# Altium PCB PCB_UCT-PCB-EEE3088F_2025-04-25.pcbdoc
Units mil, origin at the board's own origin, x right, y up, seen from the top; angles counter-clockwise.
Board outline 6270 x 3520 mil, 2 copper layers (Top Layer, Bottom Layer); 176 components, 136 nets, 463 pads, 158 vias.
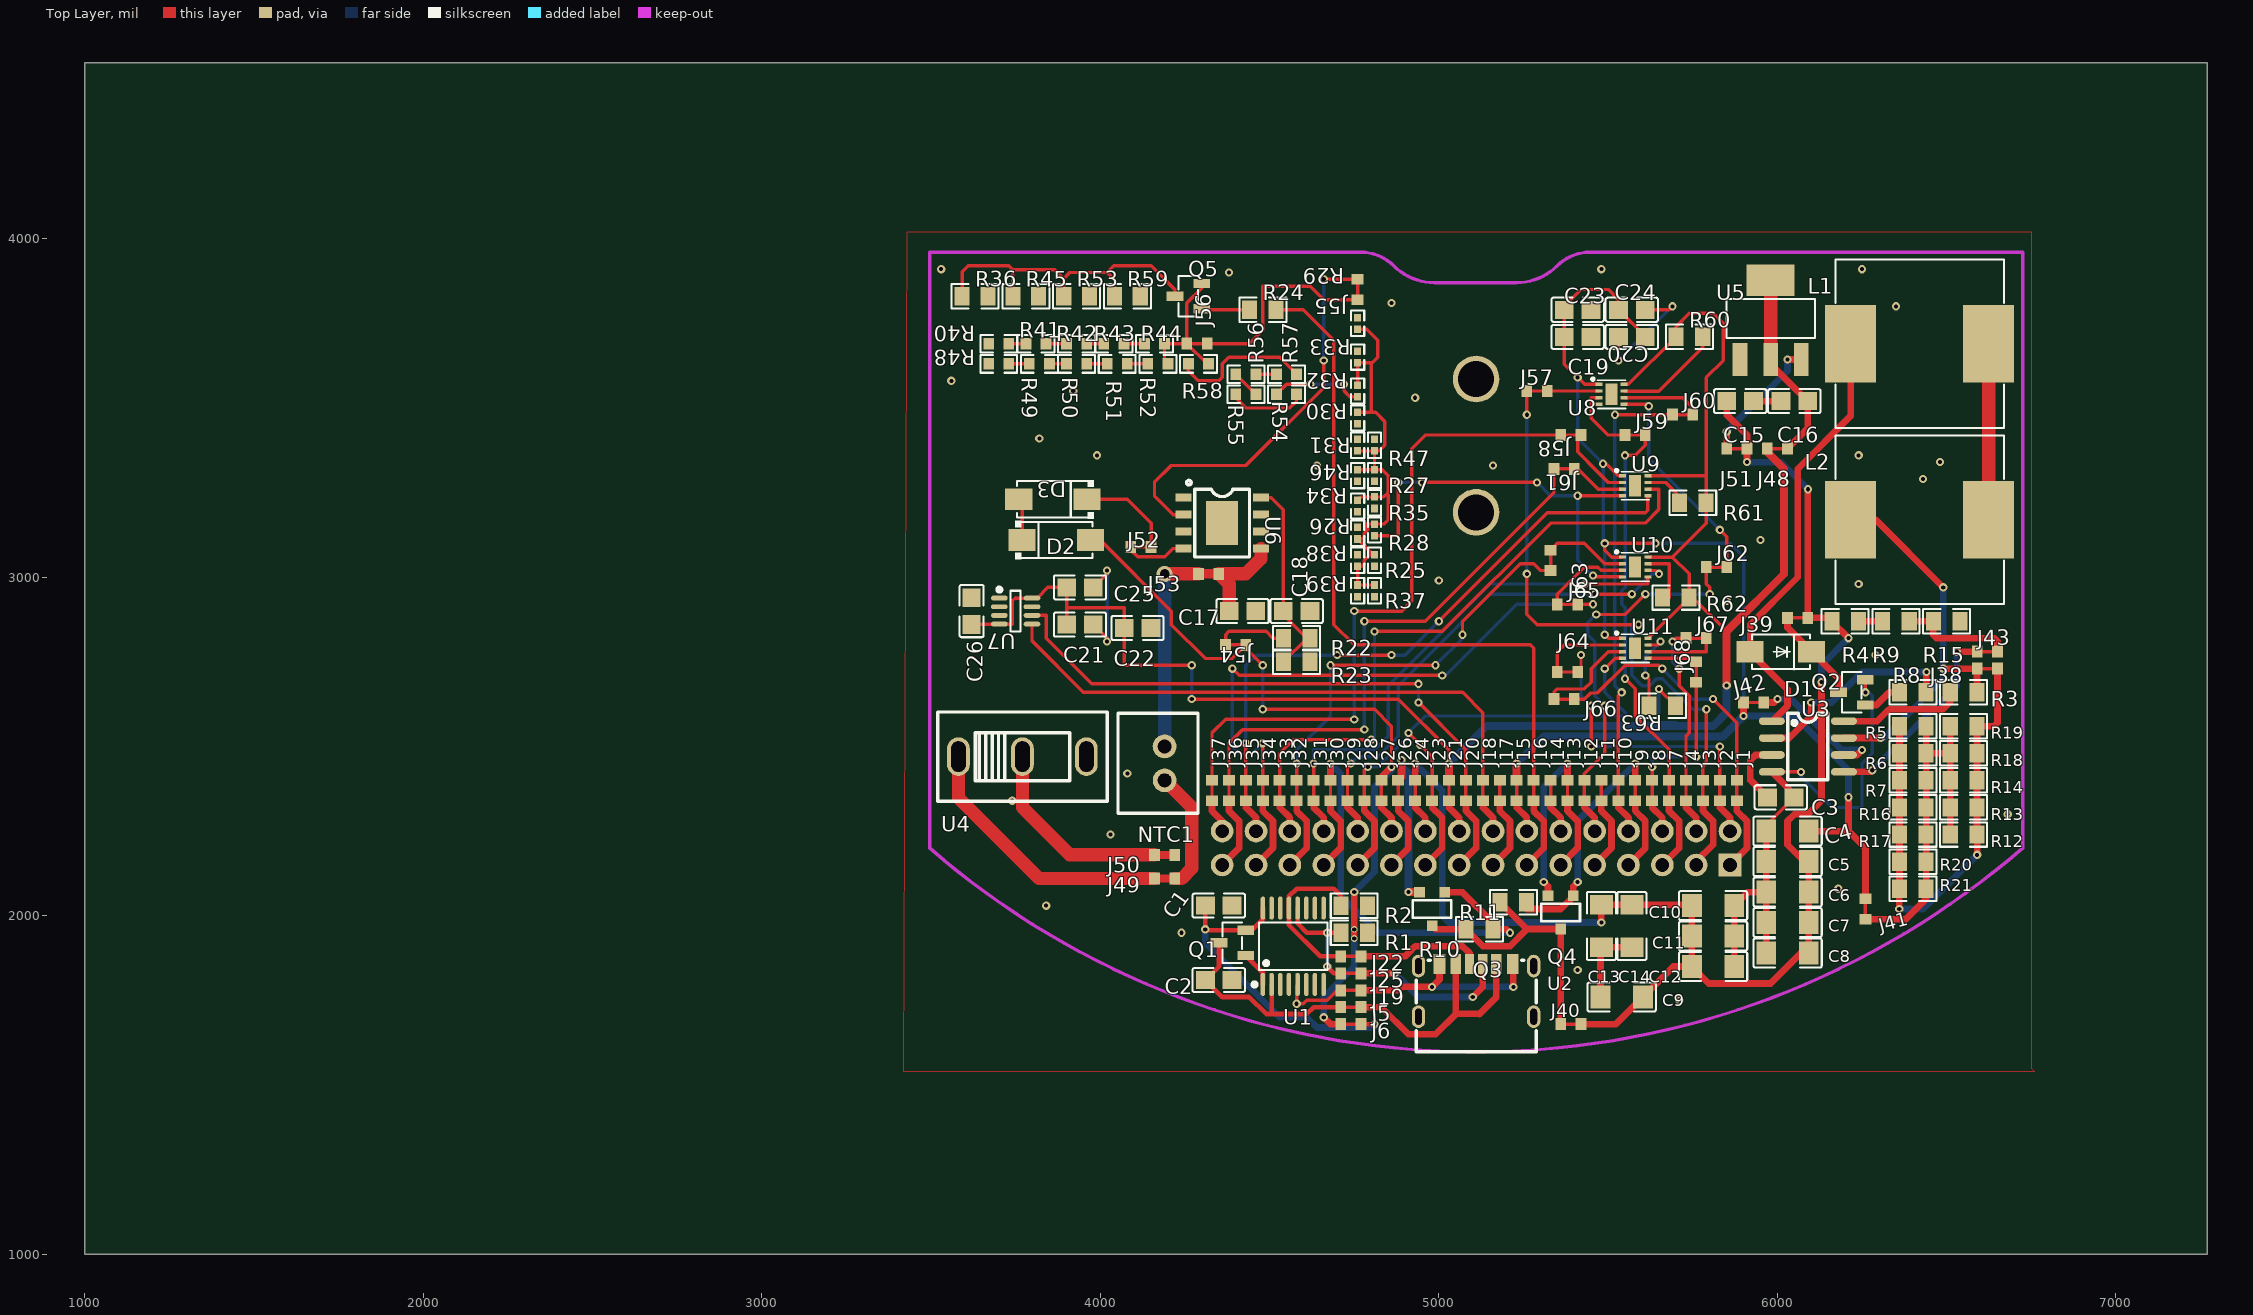
[diagram p0: Top Layer view]
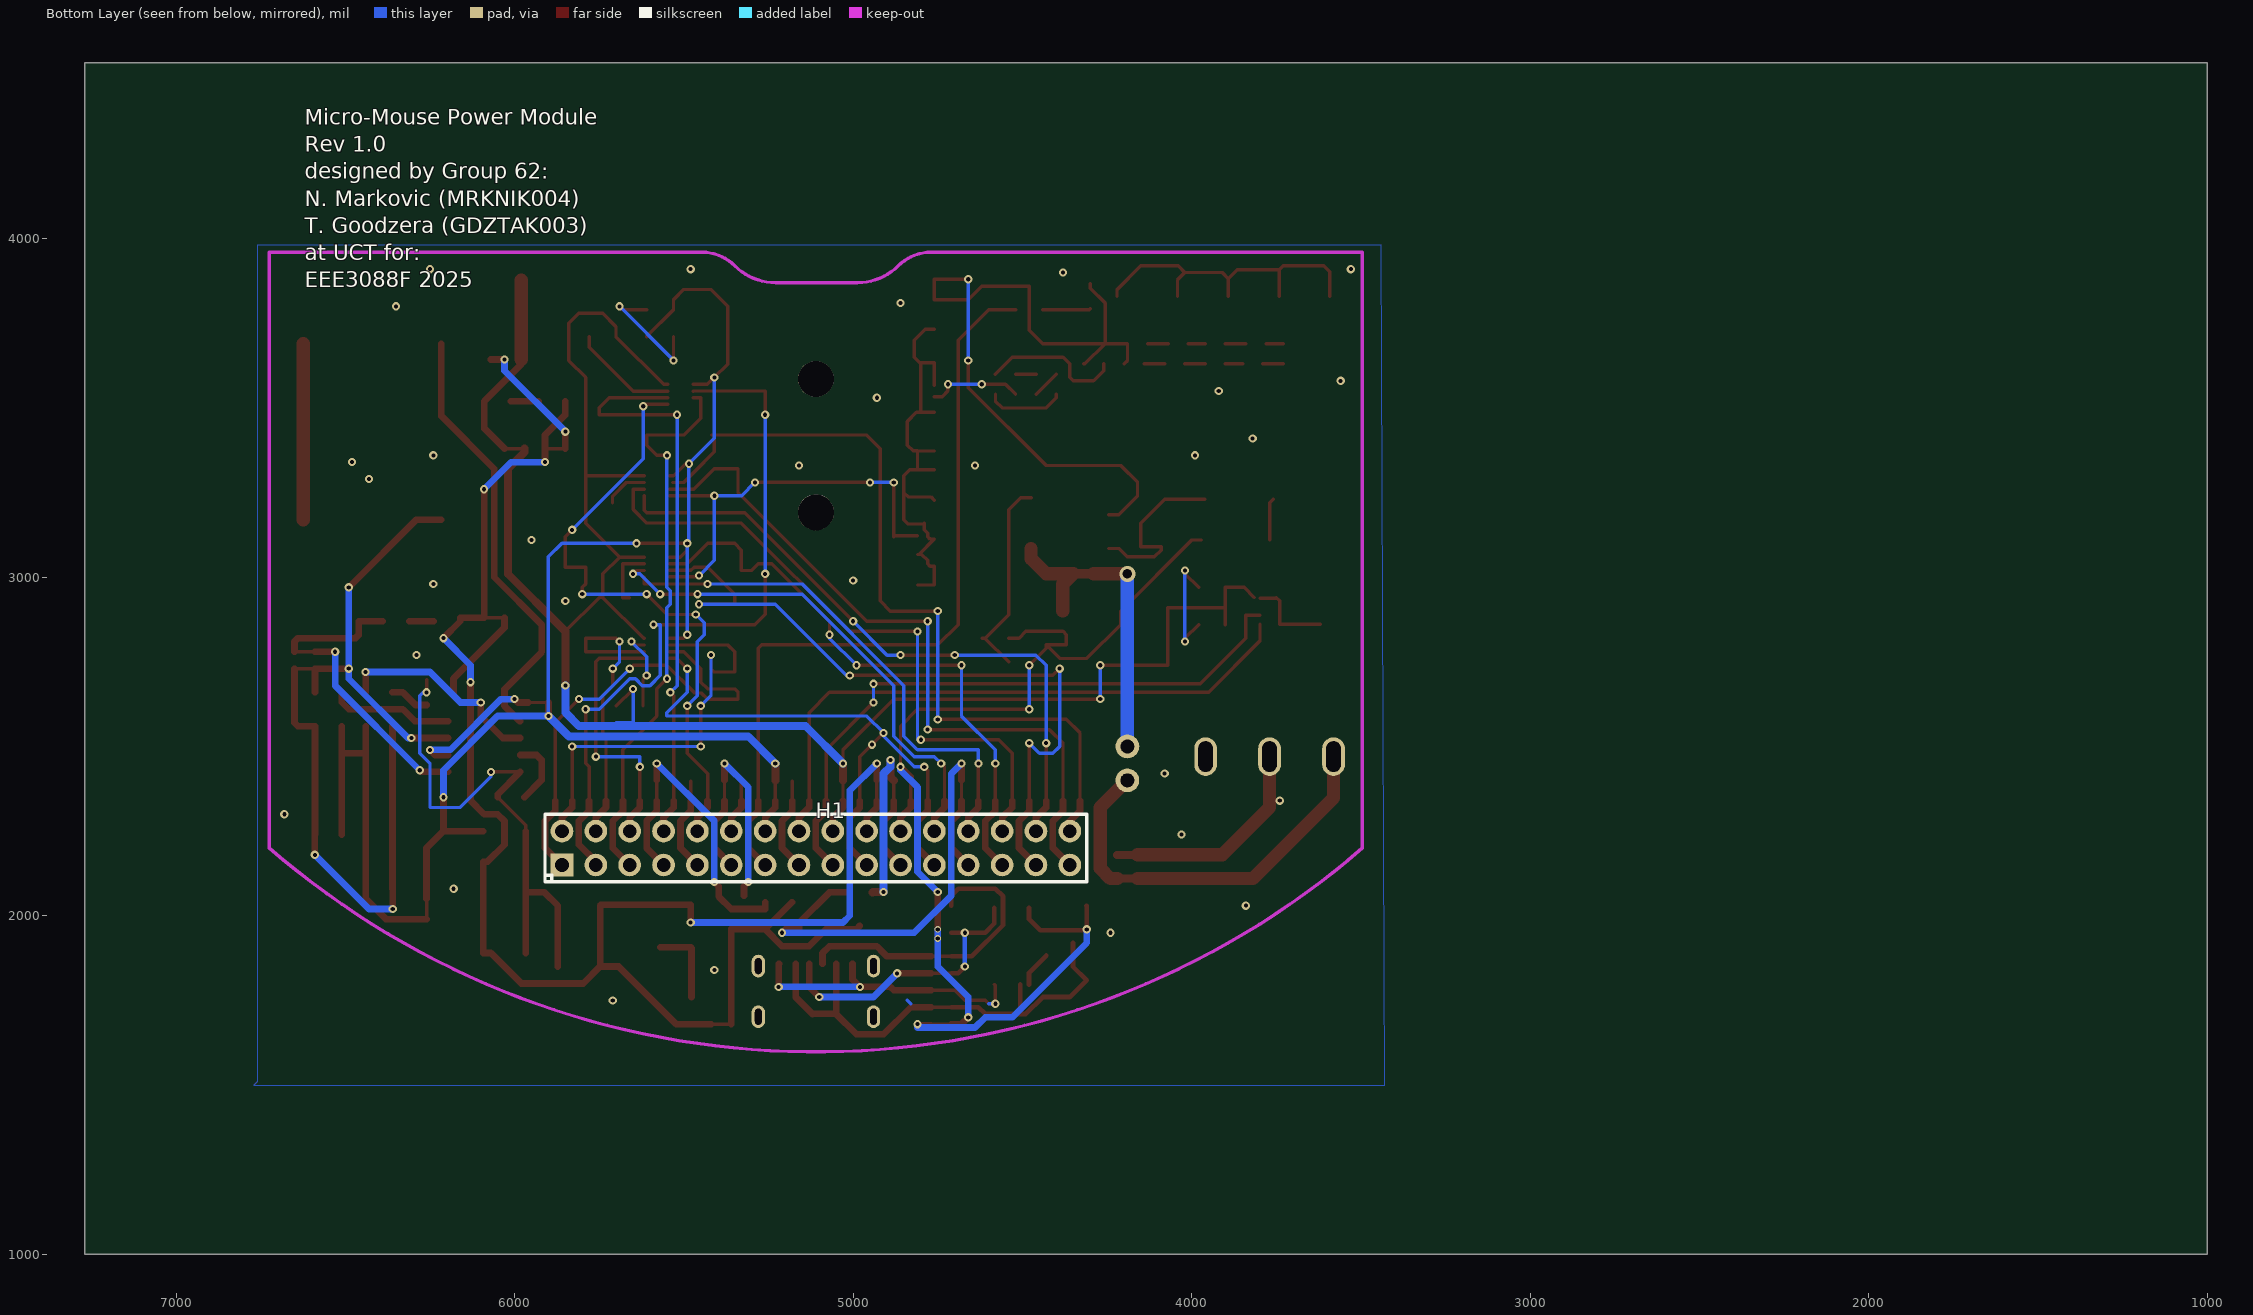
[diagram p1: Bottom Layer view, seen from below]

## Layer stack, top to bottom
Top Layer: signal copper (thickness not stored)
Dielectric: dielectric 12.6, FR-4, Dk 4.8
Bottom Layer: signal copper (thickness not stored)

## Board outline
7270,1000 1000,1000 1000,4520 7270,4520

## Components (designator, comment, footprint, x,y, rotation, side; value= is the part's Value field where it differs from the comment)
C1 "10uF" C0805 4350,2030 r0 top
C2 "1uF" C0805 4350,1810 r0 top
C3 "1nF" C0805 6010,2350 r180 top
C4 "100uF" C1206 6030,2250 r0 top
C5 "100uF" C1206 6030,2160 r0 top
C6 "100uF" C1206 6030,2070 r0 top
C7 "100uF" C1206 6030,1980 r0 top
C8 "100uF" C1206 6030,1890 r0 top
C9 "100uF" C1206 5540,1760 r0 top
C10 "100uF" C1206 5810,2030 r180 top
C11 "100uF" C1206 5810,1940 r180 top
C12 "100uF" C1206 5810,1850 r180 top
C13 "100uF" C1206 5480,1970 r90 top
C14 "100uF" C1206 5570,1970 r90 top
C15 "10uF" C0805 5890,3520 r0 top
C16 "10uF" C0805 6050,3520 r180 top
C17 "10uF" C0805 4420,2900 r0 top
C18 "10uF" C0805 4580,2900 r0 top
C19 "100nF" C0805 5410,3710 r0 top
C20 "100nF" C0805 5570,3710 r180 top
C21 "100nF" C0805 3940,2860 r0 top
C22 "100nF" C0805 4110,2850 r0 top
C23 "100nF" C0805 5410,3790 r0 top
C24 "100nF" C0805 5570,3790 r0 top
C25 "100nF" C0805 3940,2970 r0 top
C26 "100nF" C0805 3620,2900 r90 top
D1 "SS24" SMA_L4.3-W2.6-LS5.0-FD 6010,2780 r0 top
D2 "US1MG_C412437" SMA_L4.4-W2.8-LS5.4-RD 3870,3110 r0 top
D3 "US1MG_C412437" SMA_L4.4-W2.8-LS5.4-RD 3860,3230 r180 top
H1 "2X16 2.54MM" DIP-2X16P-2.54MM 4910,2200 r0 bottom
J1 "0603" JMP-0603-CUTTABLE 5880,2370 r90 top
J2 "0603" JMP-0603-CUTTABLE 5830,2370 r270 top
J3 "0603" JMP-0603-CUTTABLE 5780,2370 r90 top
J4 "0603" JMP-0603-CUTTABLE 5730,2370 r270 top
J5 "0603" JMP-0603-CUTTABLE 4740,1730 r0 top
J6 "0603" JMP-0603-CUTTABLE 4740,1680 r0 top
J7 "0603" JMP-0603-CUTTABLE 5680,2370 r90 top
J8 "0603" JMP-0603-CUTTABLE 5630,2370 r270 top
J9 "0603" JMP-0603-CUTTABLE 5580,2370 r90 top
J10 "0603" JMP-0603-CUTTABLE 5530,2370 r270 top
J11 "0603" JMP-0603-CUTTABLE 5480,2370 r90 top
J12 "0603" JMP-0603-CUTTABLE 5430,2370 r270 top
J13 "0603" JMP-0603-CUTTABLE 5380,2370 r90 top
J14 "0603" JMP-0603-CUTTABLE 5330,2370 r270 top
J15 "0603" JMP-0603-CUTTABLE 5280,2370 r90 top
J16 "0603" JMP-0603-CUTTABLE 5230,2370 r270 top
J17 "0603" JMP-0603-CUTTABLE 5180,2370 r90 top
J18 "0603" JMP-0603-CUTTABLE 5130,2370 r270 top
J19 "0603" JMP-0603-CUTTABLE 4740,1780 r0 top
J20 "0603" JMP-0603-CUTTABLE 5080,2370 r90 top
J21 "0603" JMP-0603-CUTTABLE 5030,2370 r270 top
J22 "0603" JMP-0603-CUTTABLE 4740,1880 r180 top
J23 "0603" JMP-0603-CUTTABLE 4980,2370 r90 top
J24 "0603" JMP-0603-CUTTABLE 4930,2370 r270 top
J25 "0603" JMP-0603-CUTTABLE 4740,1830 r180 top
J26 "0603" JMP-0603-CUTTABLE 4880,2370 r90 top
J27 "0603" JMP-0603-CUTTABLE 4830,2370 r270 top
J28 "0603" JMP-0603-CUTTABLE 4780,2370 r90 top
J29 "0603" JMP-0603-CUTTABLE 4730,2370 r270 top
J30 "0603" JMP-0603-CUTTABLE 4680,2370 r90 top
J31 "0603" JMP-0603-CUTTABLE 4630,2370 r270 top
J32 "0603" JMP-0603-CUTTABLE 4580,2370 r90 top
J33 "0603" JMP-0603-CUTTABLE 4530,2370 r270 top
J34 "0603" JMP-0603-CUTTABLE 4480,2370 r90 top
J35 "0603" JMP-0603-CUTTABLE 4430,2370 r270 top
J36 "0603" JMP-0603-CUTTABLE 4380,2370 r90 top
J37 "0603" JMP-0603-CUTTABLE 4330,2370 r270 top
J38 "0603" JMP-0603-CUTTABLE 6620,2730 r180 top
J39 "0603" JMP-0603-CUTTABLE 6060,2880 r0 top
J40 "0603" JMP-0603-CUTTABLE 5390,1680 r0 top
J41 "0603" JMP-0603-CUTTABLE 6260,2020 r270 top
J42 "0603" JMP-0603-CUTTABLE 5930,2630 r0 top
J43 "0603" JMP-0603-CUTTABLE 6620,2780 r180 top
J48 "0603" JMP-0603-CUTTABLE 6000,3380 r0 top
J49 "0603" JMP-0603-CUTTABLE 4190,2110 r180 top
J50 "0603" JMP-0603-CUTTABLE 4190,2180 r180 top
J51 "0603" JMP-0603-CUTTABLE 5880,3380 r0 top
J52 "0603" JMP-0603-CUTTABLE 4120,3090 r0 top
J53 "0603" JMP-0603-CUTTABLE 4320,3010 r0 top
J54 "0603" JMP-0603-CUTTABLE 4400,2800 r0 top
J55 "0603" JMP-0603-CUTTABLE 4760,3850 r90 top
J56 "0603" JMP-0603-CUTTABLE 4285.75,3690 r0 top
J57 "0603" JMP-0603-CUTTABLE 5290,3550 r180 top
J58 "0603" JMP-0603-CUTTABLE 5390,3420 r180 top
J59 "0603" JMP-0603-CUTTABLE 5580,3420 r0 top
J60 "0603" JMP-0603-CUTTABLE 5720,3480 r0 top
J61 "0603" JMP-0603-CUTTABLE 5370,3320 r180 top
J62 "0603" JMP-0603-CUTTABLE 5820,3030 r0 top
J63 "0603" JMP-0603-CUTTABLE 5330,3050 r270 top
J64 "0603" JMP-0603-CUTTABLE 5380,2720 r0 top
J65 "0603" JMP-0603-CUTTABLE 5380,2920 r0 top
J66 "0603" JMP-0603-CUTTABLE 5370,2640 r0 top
J67 "0603" JMP-0603-CUTTABLE 5760,2820 r0 top
J68 "0603" JMP-0603-CUTTABLE 5760,2720 r90 top
L1 "22uH" IND-SMD_L12.5-W12.5 6420,3690 r180 top
L2 "22uH" IND-SMD_L12.5-W12.5 6420,3170 r0 top
NTC1 "NTC/10k" "2PIN_2.54_MM_JST_XHP_JST_CONNECTOR 1" 4190,2400 r180 top
Q1 "SI2302" SOT-23-3_L2.9-W1.3-P1.90-LS2.4-BR 4390,1920 r0 top
Q2 "SI2302" SOT-23-3_L2.9-W1.3-P1.90-LS2.4-BR 6220,2660 r0 top
Q3 "SI2301_C427391" SOT-23-3_L2.9-W1.5-P1.90-LS2.6-BL 4980,2020 r180 top
Q4 "SI2301_C427391" SOT-23-3_L2.9-W1.5-P1.90-LS2.6-BL 5360,2010 r180 top
Q5 "SI2302" SOT-23-3_L2.9-W1.3-P1.90-LS2.4-BR 4260,3830 r0 top
R1 "5.1kΩ" R0805 4750,1950 r0 top
R2 "5.1kΩ" R0805 4750,2030 r0 top
R3 "180Ω" R0805 6550,2660 r180 top
R4 "3.6kΩ" R0805 6200,2870 r0 top
R5 "1Ω" R0805 6400,2560 r0 top
R6 "1Ω" R0805 6400,2480 r0 top
R7 "1Ω" R0805 6400,2400 r0 top
R8 "180Ω" R0805 6400,2660 r0 top
R9 "180Ω" R0805 6350,2870 r0 top
R10 "5.1kΩ" R0805 5120,1960 r0 top
R11 "5.1kΩ" R0805 5220,2040 r0 top
R12 "1Ω" R0805 6550,2240 r180 top
R13 "1Ω" R0805 6550,2320 r180 top
R14 "1Ω" R0805 6550,2400 r180 top
R15 "1.2kΩ" R0805 6500,2870 r0 top
R16 "1Ω" R0805 6400,2320 r0 top
R17 "1Ω" R0805 6400,2240 r0 top
R18 "1Ω" R0805 6550,2480 r180 top
R19 "1Ω" R0805 6550,2560 r180 top
R20 "1Ω" R0805 6400,2160 r0 top
R21 "1Ω" R0805 6400,2080 r0 top
R22 "5.1kΩ" R0805 4580,2820 r0 top
R23 "5.1kΩ" R0805 4580,2750 r0 top
R24 "180Ω" R0805 4480,3790 r0 top
R25 "1Ω" R0402 4810,3140 r90 top
R26 "1Ω" R0402 4760,3130 r90 top
R27 "1Ω" R0402 4810,3300 r90 top
R28 "1Ω" R0402 4810,3050 r270 top
R29 "1Ω" R0402 4760,3750 r90 top
R30 "1Ω" R0402 4760,3470 r90 top
R31 "1Ω" R0402 4760,3390 r90 top
R32 "1Ω" R0402 4760,3550 r90 top
R33 "1Ω" R0402 4760,3650 r90 top
R34 "1Ω" R0402 4760,3210 r90 top
R35 "1Ω" R0402 4810,3220 r270 top
R36 "10Ω" R0805_NEW 3630,3830 r0 top
R37 "1Ω" R0402 4810,2960 r90 top
R38 "1Ω" R0402 4760,3050 r90 top
R39 "1Ω" R0402 4760,2960 r90 top
R40 "3.3Ω" R0603 3700,3690 r0 top
R41 "3.3Ω" R0603 3810,3690 r0 top
R42 "3.3Ω" R0603 3930,3690 r0 top
R43 "3.3Ω" R0603 4040,3690 r0 top
R44 "3.3Ω" R0603 4160,3690 r0 top
R45 "10Ω" R0805_NEW 3780,3830 r0 top
R46 "1Ω" R0402 4760,3300 r90 top
R47 "1Ω" R0402 4810,3390 r90 top
R48 "3.3Ω" R0603 3700,3630 r0 top
R49 "3.3Ω" R0603 3820,3630 r0 top
R50 "3.3Ω" R0603 3930,3630 r0 top
R51 "3.3Ω" R0603 4050,3630 r0 top
R52 "3.3Ω" R0603 4170,3630 r0 top
R53 "10Ω" R0805_NEW 3930,3830 r0 top
R54 "3.3Ω" R0603 4550,3540 r0 top
R55 "3.3Ω" R0603 4430,3540 r0 top
R56 "3.3Ω" R0603 4430,3600 r0 top
R57 "3.3Ω" R0603 4550,3600 r0 top
R58 "3.3Ω" R0603 4290,3630 r0 top
R59 "10Ω" R0805_NEW 4080,3830 r0 top
R60 "5.1kΩ" R0805 5740,3710 r0 top
R61 "5.1kΩ" R0805 5750,3220 r180 top
R62 "5.1kΩ" R0805 5700,2940 r180 top
R63 "5.1kΩ" R0805 5660,2620 r180 top
U1 "IP2721" TSSOP-16_L5.0-W4.4-P0.65-LS6.4-BL 4570,1910 r0 top
U2 "TYPE-C" USB-C-SMD_HC-TYPE-C-6P-010B 5110,1780 r0 top
U3 "MC34063ADR2G" SOIC-8_L5.0-W4.0-P1.27-LS6.0-BL 6090,2500 r270 top
U4 "HX" SW-TH_3P-P4.80-HX-SS12D10G4 3770,2470 r0 top
U5 "AMS1117-3.3" SOT-223-3_L6.5-W3.4-P2.30-LS7.0-BR 5980,3760 r270 top
U6 "TP4056" ESOP-8_L4.9-W3.9-P1.27-LS6.0-BL-EP 4360,3160 r270 top
U7 "INA219AIDCNR" SOT-23-8_L3.0-W1.7-P0.65-LS2.8-BR 3750,2900 r180 top
U8 "DRV8837CDSGR" WSON-8_L2.0-W2.0-P0.50-TL-EP 5510,3540 r0 top
U9 "DRV8837CDSGR" WSON-8_L2.0-W2.0-P0.50-TL-EP 5580,3270 r0 top
U10 "DRV8837CDSGR" WSON-8_L2.0-W2.0-P0.50-TL-EP 5580,3030 r0 top
U11 "DRV8837CDSGR" WSON-8_L2.0-W2.0-P0.50-TL-EP 5580,2790 r0 top

## Footprints (in the part's own frame and the unit in brackets; to place one, negate y for a bottom-side part, rotate by r counter-clockwise, add the part's x,y. Pads: shape width x height; smd on the part's side, far side on the other; paste and mask are expansions set on the pad)
"2PIN_2.54_MM_JST_XHP_JST_CONNECTOR 1" [mil]
  round 70 hole 40 slot 40.2 at 0 deg paste+0 mask+2: 1(0,0) 2(0.08,-100.06)
  silkscreen extent -98,-198 138,97
C0805 [mm]
  rect 1.41x1.35 smd paste-100 mask+0.051: 1(-1,0) 2(1,0)
  silkscreen extent -1.96,-0.9 1.96,0.9
C1206 [mm]
  rect 1.485x1.728 smd paste-100 mask+0.051: 1(-1.593,0) 2(1.593,0)
  silkscreen extent -2.56,-1.09 2.56,1.09
DIP-2X16P-2.54MM [mm]
  rect 1.7x1.7 hole 1.02 paste+0 mask+0.051: 1(24.13,1.27)
  round 1.7 hole 1.02 paste+0 mask+0.051: 2(24.13,-1.27) 3(21.59,1.27) 4(21.59,-1.27) 5(19.05,1.27) 6(19.05,-1.27) 7(16.51,1.27) 8(16.51,-1.27) 9(13.97,1.27) 10(13.97,-1.27) 11(11.43,1.27) 12(11.43,-1.27) 13(8.89,1.27) 14(8.89,-1.27) 15(6.35,1.27) 16(6.35,-1.27) 17(3.81,1.27) 18(3.81,-1.27) 19(1.27,1.27) 20(1.27,-1.27) 21(-1.27,1.27) 22(-1.27,-1.27) 23(-3.81,1.27) 24(-3.81,-1.27) 25(-6.35,1.27) 26(-6.35,-1.27) 27(-8.89,1.27) 28(-8.89,-1.27) 29(-11.43,1.27) 30(-11.43,-1.27) 31(-13.97,1.27) 32(-13.97,-1.27)
  silkscreen extent -15.24,-2.54 25.4,2.54
ESOP-8_L4.9-W3.9-P1.27-LS6.0-BL-EP [mm]
  rect 0.6x1.2 smd paste+0 mask+0.051: 1(-1.905,-2.908) 2(-0.635,-2.908) 3(0.635,-2.908) 4(1.905,-2.908) 5(1.905,2.908) 6(0.635,2.908) 7(-0.635,2.908) 8(-1.905,2.908)
  rect 3.3x2.4 smd paste+0 mask+0.051: 9(0,0)
  silkscreen extent -3.2,-2.67 2.55,2.05
IND-SMD_L12.5-W12.5 [mm]
  rect 3.824x5.82 smd paste+0 mask+0.051: 1(5.178,0) 2(-5.178,0)
  silkscreen extent -6.33,-6.33 6.33,6.33
JMP-0603-CUTTABLE [mm]
  rect 0.8x0.9 smd paste+0 mask+0.102: 1(-0.762,0) 2(0.762,0)
  Top Layer lines w0.254: -0.7,0 0.7,0
R0402 [mm]
  rect 0.566x0.54 smd paste-100 mask+0.051: 1(-0.433,0) 2(0.433,0)
  silkscreen extent -0.94,-0.5 0.94,0.5
R0603 [mil]
  rect 31.75x34.02 smd paste-3937.01 mask+2: 1(-29.66,0) 2(29.65,0)
  silkscreen extent -55,-26 55,26
R0805 [mil]
  rect 44.59x54.21 smd paste-3937.01 mask+2: 1(-39.37,0) 2(39.37,0)
  silkscreen extent -69,-36 69,36
R0805_NEW [mil]
  rect 44.59x54.21 smd paste-3937.01 mask+2: 1(-38.04,0) 2(38.04,0)
  silkscreen extent -69,-36 69,36
SMA_L4.3-W2.6-LS5.0-FD [mm]
  rect 2.046x1.62 smd paste+0 mask+0.051: 1(-2.304,-0.009) 2(2.304,0.009)
  silkscreen extent -2.17,-1.32 2.19,1.29
SMA_L4.4-W2.8-LS5.4-RD [mm]
  rect 2.046x1.62 smd paste+0 mask+0.051: 1(-2.566,0) 2(2.565,0)
  silkscreen extent -3.08,-1.44 2.7,1.44
SOIC-8_L5.0-W4.0-P1.27-LS6.0-BL [mil]
  oval 22.38x76.78 smd paste+0 mask+2: 1(-75,-106.5) 2(-25,-106.5) 3(25,-106.5) 4(75,-106.5) 5(75,106.5) 6(25,106.5) 7(-25,106.5) 8(-75,106.5)
  silkscreen extent -98,-59 98,59
SOT-23-3_L2.9-W1.3-P1.90-LS2.4-BR [mm]
  rect 1.25x0.7 smd paste+0 mask+0.051: 1(1,-0.95) 2(1,0.95) 3(-1,0)
  silkscreen extent -0.73,-1.53 0.73,1.53
SOT-23-3_L2.9-W1.5-P1.90-LS2.6-BL [mm]
  rect 0.8x0.8 smd paste+0 mask+0.05: 1(-0.95,-1.25) 2(0.95,-1.25) 3(0,1.25)
  silkscreen extent -1.44,-0.66 1.46,0.66
SOT-23-8_L3.0-W1.7-P0.65-LS2.8-BR [mil]
  oval 49.29x14.33 smd paste+0 mask+2: 1(48.27,-38.39) 2(48.28,-12.8) 3(48.28,12.79) 4(48.27,38.39) 5(-48.27,38.39) 6(-48.26,12.79) 7(-48.26,-12.8) 8(-48.27,-38.39)
  silkscreen extent -15,-69 54,60
SOT-223-3_L6.5-W3.4-P2.30-LS7.0-BR [mm]
  rect 2.5x1.1 smd paste+0 mask+0.051: 1(2.97,-2.3) 2(2.97,0) 3(2.97,2.3)
  rect 2.34x3.6 smd paste+0 mask+0.051: 4(-2.97,0)
  silkscreen extent -1.57,-3.33 1.37,3.33
SW-TH_3P-P4.80-HX-SS12D10G4 [mm]
  oval 1.7x2.9 hole 1.1 slot 2.3 at 90 deg paste+0 mask+0.05: 1(-4.8,0) 2(0,0) 3(4.8,0)
  silkscreen extent -6.35,-3.35 6.35,3.35
TSSOP-16_L5.0-W4.4-P0.65-LS6.4-BL [mm]
  oval 0.343x1.731 smd paste+0 mask+0.051: 1(-2.275,-2.866) 2(-1.625,-2.866) 3(-0.975,-2.866) 4(-0.325,-2.866) 5(0.325,-2.866) 6(0.975,-2.866) 7(1.625,-2.866) 8(2.275,-2.866) 9(2.275,2.866) 10(1.625,2.866) 11(0.975,2.866) 12(0.325,2.866) 13(-0.325,2.866) 14(-0.975,2.866) 15(-1.625,2.866) 16(-2.275,2.866)
  silkscreen extent -3.05,-3.02 2.58,1.77
USB-C-SMD_HC-TYPE-C-6P-010B [mm]
  oval 1x1.7 hole 0.5 slot 1.2 at 90 deg paste+0 mask+0.051: 1(-4.32,1.815) 2(4.32,1.815) 3(-4.32,-1.985) 4(4.32,-1.985)
  rect 0.7x1.5 smd paste-100 mask+0.051: A5(-0.5,1.985) B5(0.5,1.985)
  rect 0.8x1.5 smd paste-100 mask+0.051: A9(1.52,1.985) B9(-1.52,1.985)
  rect 0.9x1.5 smd paste-100 mask+0.051: A12(2.75,1.985) B12(-2.75,1.985)
  silkscreen extent -4.5,-4.6 4.5,2.25
WSON-8_L2.0-W2.0-P0.50-TL-EP [mm]
  rect 0.521x0.25 smd paste+0 mask+0.05: 1(-0.95,0.75) 2(-0.95,0.25) 3(-0.95,-0.25) 4(-0.95,-0.75) 5(0.95,-0.75) 6(0.95,-0.25) 7(0.95,0.25) 8(0.95,0.75)
  rect 0.9x1.6 smd paste+0 mask+0.05: 9(0,0)
  silkscreen extent -1.47,-1.06 1.06,1.22

## Free pads (board coordinates)
  round 137.79 smd paste-3937.01 mask+2: 1(5110,3191.73) 1(5110,3585.43)
  round 106.3 hole 106.3 unplated paste+0: ""(5110,3191.73) ""(5110,3585.43)

## Via types
v1: diameter 24.41, hole 12.2, Top Layer to Bottom Layer, tented both sides, 155 vias
v2: diameter 19.69, hole 12.2, Top Layer to Bottom Layer, tented both sides, 2 vias
v3: diameter 47.24, hole 27.56, Top Layer to Bottom Layer, tented both sides, 1 vias

## Nets (pads, with @x,y where several pads share a name; then routed paths per layer and width w, separated by ;. In a path a pad name is that pad's centre, name@x,y a point inside that pad or via, vN(x,y) a via of type N, cw(c..) or ccw(c..) an arc to the next point about the centre after c; other vN are vias at no path point)
001: pad.1@5110,3191.73
002: pad.1@5110,3585.43
3V3: C21.1 C22.1 C25.1 C26.1 J21.1 J48.1 R60.1 R61.1 R62.1 R63.1 U7.4 U7.8 U8.8 U9.8 U10.8 U11.8 | length 5871.7
  Top Layer w10: C26.1 U7.4 ; U7.4 3740,2861.61 3740,2930 3750,2940 3751.61,2938.39 U7.8 ; U7.8@3814.69,2940 3844.69,2970 C25.1 C21.1 ; 3900.63,2910 4070.63,2910 C22.1 4070.63,2740 ; 4070.6,2740 v1(4270,2740) ; v1(4270,2640) 4880,2640 5030,2490 v1(5030,2450) ; U8.8 5559.5,3569.5 R60.1 5700.6,3740.6 5740,3780 5810,3780 5840,3750 5840,3640 5790,3590 5790,3283 ; U11.8 5618.9,2819.53 R62.1 ; U10.8 5689.53,3059.53 ; U9.8 5789.4,3299.5 R61.1 ; v1(5650,2670) 5650,2669.37 R63.1 ; R61.1 5789.37,3159.37 5689.53,3059.53 ; 5850,2840 5750,2940 R62.1 ; 5689.53,3059.53 5739.37,3009.69 R62.1
  Top Layer w23.62: J21.1 v1(5030,2450) ; v1(5850,2680) 5850,2840 5860,2850 6020,3010 6020,3320 5970,3369.99 J48.1
  Bottom Layer w10: v1(4270,2640) v1(4270,2740) ; v1(5650,2670) 5650,2570 5699.4,2570
  Bottom Layer w23.62: v1(5030,2450) 5140,2560 5810,2560 5850,2600 v1(5850,2680)
D1_2: D1.2 J39.1 Q2.3 | length 282.4
  Top Layer w19.68: J39.1 6030,2851.1 D1.2 6180.6,2700.4 Q2.3
D3_1: D3.1 J52.2 | length 288
  Top Layer w10: D3.1 4080,3230 4150,3160 J52.2
D3_2: D2.1 D3.2 | length 124.1
  Top Layer w10: D3.2 3769,3220 D2.1
GND: C1.2 C2.2 C3.1 C4.1 C5.1 C6.1 C7.1 C8.1 C9.1 C10.1 C11.1 C12.1 C13.1 C14.1 C15.2 C16.2 C17.2 C18.2 C19.2 C20.2 C21.2 C22.2 C23.2 C24.2 C25.2 C26.2 J19.1 J23.2 J28.2 J50.1 J50.2 Q2.2 R1.2 R2.2 R15.2 R23.2 R25.1 R26.2 R27.1 R28.2 R29.2 R30.1 R31.2 R32.1 R33.2 R34.1 R35.2 R36.2 R37.1 R38.2 R39.1 R40.1 R45.2 R46.1 R47.2 R48.1 R53.2 R54.1 R59.2 U1.5 U3.4 U4.2 U5.1 U6.1 U6.3 U6.6 U6.7 U6.9 U7.1 U7.2 U7.3 U7.7 U8.4 U9.4 U10.4 U11.4 | length 6376.1
  Top Layer w10: C21.2 4020,2819.37 v1(4020,2810) ; C25.2 4020,3010.63 v1(4020,3020) ; R54.1@4520.35,3540 4520.35,3540.35 4550,3570 v1(4620,3570) ; U1.5 4580,1794.37 v1(4580,1740) 4600,1740 4610,1750 4670,1750 J19.1@4700,1780 ; v1(4720,3570) 4720,3550 4737.04,3532.96 R32.1 ; J28.2 4780,2430 v1(4790,2440) ; R25.1 4877.04,3122.96 4880,3120 v1(4880,3280) ; v1(4910,2540) v1(4944.5,2505.5) 4980,2470 J23.2 ; v1(4950,3280) 5210,3280 v1(5290,3280) ; v1(5410,3240.47) U9.4 ; v1(5455,3005) 5459,3001 U10.4@5543,3001 ; v1(5490,2730) 5520.47,2760.47 U11.4 ; v1(5530.63,3640) C20.2 ; C24.2 5680,3790 v1(5690,3800) ; C4.1 5967.3,2267.93 C3.1 ; U3.4 v1(6070,2425) ; Q2.2 6260,2696.77 v1(6260,2660) ; J19.1@4700,1780 J19.1 ; J19.1@4700,1780 J19.1 ; J19.1@4700,1780 J19.1
  Top Layer w19.68: C9.1 5477.3,1904.6 C13.1 C14.1 ; C12.1 C10.1 5912.7,2070 C6.1 ; C15.2 C16.2 ; C8.1 C4.1 ; U3.4 6049.37,2359.13 C3.1
  Top Layer w23.62: J50.2 J50.1
  Top Layer w39.37: U4.2 3770.01,2320 3910,2180.01 J50.2
  Bottom Layer w10: v1(4020,2810) v1(4020,3020) ; v1(4580,1740) 4600,1740 ; v1(4620,3570) v1(4720,3570) ; v1(4790,2440) 4820,2440 4910,2530 v1(4910,2540) 4960,2590 5550,2590 5550,2600 5490,2660 v1(5490,2730) ; 4830,1740 4840,1750 ; v1(4880,3280) v1(4950,3280) ; v1(5290,3280) 5329.53,3240.47 v1(5410,3240.47) 5410,3050 v1(5455,3005) ; v1(5530.63,3640) 5530.63,3640.63 v1(5690,3800) ; v1(6070,2425) 6070,2410 6160,2320 6250,2320 6250,2450 6280,2480 6280,2650 6270,2660 v1(6260,2660)
  other v1: 5710,1750 5410,1840 4240,1950 3840,2030 6180,2080 4030,2240 6680,2300 3740,2340 4080,2420 6290,2770 5850,2930 6240,2980 5000,2990 5950,3110 6430,3290 4640,3330 5160,3330 6480,3340 3990,3360 6240,3360 3820,3410 4930,3530 3920,3550 3560,3580 6350,3800 4860,3810 4380,3900 3530,3910 5480,3910 6250,3910
H1_1: H1.1 J1.1 | length 223.1
  Top Layer w19.68: H1.1 5910,2200 5910,2280 5880,2310 J1.1
H1_2: H1.2 J2.2 | length 102.4
  Top Layer w19.68: J2.2 5830,2320 5860,2290 H1.2
H1_3: H1.3 J3.1 | length 223.1
  Top Layer w19.68: H1.3 5760,2160 5810,2210 5810,2280 5780,2310 J3.1
H1_4: H1.4 J4.2 | length 102.4
  Top Layer w19.68: J4.2 5730,2320 5760,2290 H1.4
H1_5: H1.5 J7.1 | length 223.1
  Top Layer w19.68: H1.5 5710,2200 5710,2280 5680,2310 J7.1
H1_6: H1.6 J8.2 | length 102.4
  Top Layer w19.68: J8.2 5630,2320 5660,2290 H1.6
H1_7: H1.7 J9.1 | length 223.1
  Top Layer w19.68: H1.7 5610,2200 5610,2280 5580,2310 J9.1
H1_8: H1.8 J10.2 | length 102.4
  Top Layer w19.68: J10.2 5530,2320 5560,2290 H1.8
H1_9: H1.9 J11.1 | length 223.1
  Top Layer w19.68: H1.9 5510,2200 5510,2280 5480,2310 J11.1
H1_10: H1.10 J12.2 | length 102.4
  Top Layer w19.68: J12.2 5430,2320 5460,2290 H1.10
H1_11: H1.11 J13.1 | length 223.1
  Top Layer w19.68: H1.11 5410,2200 5410,2280 5380,2310 J13.1
H1_12: H1.12 J14.2 | length 102.4
  Top Layer w19.68: J14.2 5330,2320 5360,2290 H1.12
H1_13: H1.13 J15.1 | length 223.1
  Top Layer w19.68: H1.13 5310,2200 5310,2280 5280,2310 J15.1
H1_14: H1.14 J16.2 | length 102.4
  Top Layer w19.68: J16.2 5230,2320 5260,2290 H1.14
H1_15: H1.15 J17.1 | length 223.1
  Top Layer w19.68: H1.15 5210,2200 5210,2280 5180,2310 J17.1
H1_16: H1.16 J18.2 | length 102.4
  Top Layer w19.68: J18.2 5129.99,2320.01 5160,2290 H1.16
H1_17: H1.17 J20.1 | length 223.1
  Top Layer w19.68: H1.17 5110,2200 5110,2280 5080,2310 J20.1
H1_18: H1.18 J21.2 | length 102.4
  Top Layer w19.68: J21.2 5030,2320 5060,2290 H1.18
H1_19: H1.19 J23.1 | length 223.1
  Top Layer w19.68: H1.19 5010,2200 5010,2290 4980,2320 J23.1
H1_20: H1.20 J24.2 | length 102.4
  Top Layer w19.68: J24.2 4930,2320 4960,2290 H1.20
H1_21: H1.21 J26.1 | length 223.1
  Top Layer w19.68: H1.21 4910,2200 4910,2280 4880,2310 J26.1
H1_22: H1.22 J27.2 | length 102.4
  Top Layer w19.68: J27.2 4830,2320 4860,2290 H1.22
H1_23: H1.23 J28.1 | length 223.1
  Top Layer w19.68: H1.23 4810,2200 4810,2280 4780.01,2310 J28.1
H1_24: H1.24 J29.2 | length 102.4
  Top Layer w19.68: J29.2 4730,2320 4760,2290 H1.24
H1_25: H1.25 J30.1 | length 223.1
  Top Layer w19.68: H1.25 4710,2200 4710,2280 4680.01,2310 J30.1
H1_26: H1.26 J31.2 | length 102.4
  Top Layer w19.68: J31.2 4630,2320 4660,2290 H1.26
H1_27: H1.27 J32.1 | length 223.1
  Top Layer w19.68: H1.27 4610,2200 4610,2280 4580.01,2310 J32.1
H1_28: H1.28 J33.2 | length 102.4
  Top Layer w19.68: J33.2 4530,2320 4560,2290 H1.28
H1_29: H1.29 J34.1 | length 223.1
  Top Layer w19.68: H1.29 4510,2200 4510,2280 4480.01,2310 J34.1
H1_30: H1.30 J35.2 | length 102.4
  Top Layer w19.68: J35.2 4430,2320 4460,2290 H1.30
H1_31: H1.31 J36.1 | length 223.1
  Top Layer w19.68: H1.31 4410,2200 4410,2280 4380.01,2310 J36.1
H1_32: H1.32 J37.2 | length 102.4
  Top Layer w19.68: J37.2 4330,2310 4360,2280 H1.32
ISET: J55.1 J56.2 | length 607.4
  Top Layer w10: J56.2 4440,3690 4480,3730 4480,3860 4620,3860 4660,3820 J55.1
L1_2: L1.2 L2.1 | length 520
  Top Layer w39.37: L2.1 L1.2
MM_5V5: C5.2 C6.2 C7.2 C8.2 C9.2 C10.2 C11.2 C12.2 C13.2 C14.2 C15.1 J24.1 J39.2 J40.2 J51.2 R4.1 | length 4323.9
  Top Layer w19.68: J24.1 v1(4930,2450) ; J40.2 5522.7,1680 C9.2 5692.7,1850 C12.2 ; v1(5480,1980) C13.2 5744.6,2032.7 C10.2 C12.2 ; C15.1 5850.6,3479.4 5910,3420 J51.2 v1(5910,3340) ; v1(6090,3260) J39.2 6160.6,2880 R4.1 6210,2820.6 v1(6210,2820) ; v1(6130,2690) 6130,2360 6130,2340 6090,2300 6050,2300 6030,2280 6030,2210 6080,2160 C5.2 C8.2 6070,1890 5980,1800 5797.3,1800 C12.2
  Bottom Layer w19.68: v1(4930,2450) 5010,2370 5010,2000 5030,1980 v1(5480,1980) ; v1(5910,3340) 6010,3340 v1(6090,3260) ; v1(6130,2690) 6130,2740 v1(6210,2820)
MM_EXT1CTRL: J30.2 Q3.1 R10.2 | length 1251.6
  Top Layer w19.68: J30.2 v1(4680,2450) ; Q3.1 5070,2069.21 5159.37,1979.84 R10.2 5200,1960 v1(5210,1950)
  Bottom Layer w19.68: v1(4680,2450) 4710,2420 4710,2060 4820,1950 v1(5210,1950)
MM_EXT1OUT: J26.2 Q3.2 | length 495.4
  Top Layer w23.62: J26.2 4890,2409.99 v1(4890,2460) ; v1(4910,2070) 4941.81,2070 Q3.2
  Bottom Layer w23.62: v1(4890,2460) 4890,2440 4910,2420 v1(4910,2070)
MM_EXT2CTRL: J9.2 Q4.1 R11.2 | length 691.8
  Top Layer w19.68: R11.2 5259.37,2020 5360,2020 5397.4,2057.4 Q4.1 5397.4,2087.4 v1(5410,2100) ; J9.2 v1(5580,2450)
  Bottom Layer w19.68: v1(5410,2100) 5410,2280 v1(5580,2450)
MM_EXT2OUT: J13.2 Q4.2 | length 475
  Top Layer w19.68: v1(5310,2100) 5322.6,2087.4 Q4.2 ; J13.2 v1(5380,2450)
  Bottom Layer w19.68: v1(5310,2100) 5310,2380 v1(5380,2450)
MM_FASTCHCTRL: J15.2 R24.2 | length 2056.9
  Top Layer w10: R24.2 4600,3790 4690,3700 4690,2860 4750,2800 5270,2800 5280,2790 J15.2
MM_I2C1SCL: J18.1 U7.5 | length 1669.3
  Top Layer w10: U7.5 3798.3,2811.7 3950,2660 5070,2660 5130,2600 J18.1
MM_I2C1SDA: J20.2 U7.6 | length 1607.8
  Top Layer w10: U7.6 3840,2887.21 3840,2820 3975,2685 v1(4940,2685) ; v1(4940,2630) 5080,2490 J20.2
  Bottom Layer w10: v1(4940,2630) v1(4940,2685)
MM_M1AOUT: J37.1 J58.2 | length 1985.6
  Top Layer w10: J37.1 4330,2540 4370,2580 v1(4750,2580) ; v1(4750,2900) 4890,2900 4920,2930 4920,3380 4960,3420 4980,3420 J58.2
  Bottom Layer w10: v1(4750,2580) 4750,2590 v1(4750,2900)
MM_M1BOUT: J36.2 J61.2 | length 1634
  Top Layer w10: J36.2 4380,2510 4420,2550 v1(4780,2550) ; v1(4780,2870) 4960,2870 5020,2930 5340,3250 J61.2
  Bottom Layer w10: v1(4780,2550) v1(4780,2870)
MM_M1CTRL1: J33.1 U9.6 | length 1778.4
  Top Layer w10: J33.1 4530,2480 4570,2520 v1(4800,2520) ; v1(4810,2840) 5010,2840 5330,3160 5610,3160 5650,3200 5650,3260.1 U9.6@5617.4,3260.1
  Bottom Layer w10: v1(4800,2520) 4810,2520 v1(4810,2840)
MM_M1CTRL2: J35.1 U9.5 | length 1759.9
  Top Layer w10: J35.1 v1(4430,2510) ; v1(4700,2770) 4820,2770 v1(4860,2770) ; v1(5000,2870) 5320,3190 5610,3190 5617.4,3197.4 U9.5
  Bottom Layer w10: v1(4430,2510) 4430,2740 4460,2770 v1(4700,2770) ; v1(4860,2770) 4900,2770 v1(5000,2870)
MM_M2AOUT: J2.1 J64.2 | length 816.6
  Top Layer w10: J64.2 5420,2730 v1(5420,2770) ; v1(5450,2500) v1(5450,2620) ; J2.1 v1(5830,2500)
  Bottom Layer w10: v1(5420,2770) 5420,2650 v1(5450,2620) ; v1(5450,2500) 5730,2500 5770,2500 v1(5830,2500)
MM_M2BOUT: J1.2 J66.2 | length 761.8
  Top Layer w10: J66.2 5430,2640 5448,2658 5468,2658 5550,2740 5650,2740 v1(5660,2730) ; v1(5810,2640) 5880,2570 J1.2
  Bottom Layer w10: v1(5660,2730) 5750,2640 v1(5810,2640)
MM_M2CTRL1: J4.1 J67.1 | length 479
  Top Layer w10: v1(5690,2810) 5700,2820 J67.1 ; v1(5710,2730) 5710,2680 5740,2650 5740,2540 5730,2530 J4.1
  Bottom Layer w10: v1(5690,2810) 5690,2750 v1(5710,2730)
MM_M2CTRL2: J8.1 J68.1 | length 420
  Top Layer w10: J8.1 v1(5630,2440) ; v1(5760,2470) J68.1
  Bottom Layer w10: v1(5630,2440) 5630,2470 v1(5760,2470)
MM_M3AOUT: J32.2 J63.2 | length 1193.3
  Top Layer w10: J32.2 v1(4580,2450) ; v1(4680,2740) 4760,2740 v1(4990,2740) ; v1(5070,2830) 5070,2870 5240,3040 5280,3040 5300,3020 J63.2
  Bottom Layer w10: v1(4580,2450) 4580,2490 4680,2590 v1(4680,2740) ; v1(4990,2740) 5070,2820 v1(5070,2830)
MM_M3BOUT: J34.2 J65.2 | length 1655.9
  Top Layer w10: v1(4390,2730) 4410,2710 v1(5010,2710) ; J34.2 v1(4480,2510) ; J65.2 v1(5455,2920)
  Bottom Layer w10: v1(4390,2730) 4390,2500 4410,2480 4449.7,2480 v1(4480,2510) ; v1(5010,2710) 5020,2710 5230,2920 v1(5455,2920)
MM_M3CTRL1: J29.1 U10.6 | length 1321.1
  Top Layer w10: J29.1 4730,2440 v1(4740,2450) ; v1(5460,2950) v1(5570,2950) ; U10.6@5617,3020 5640,3020 v1(5650,3010)
  Bottom Layer w10: v1(4740,2450) 4760,2470 4820,2470 4880,2530 4880,2680 5150,2950 v1(5460,2950) ; v1(5570,2950) 5630,3010 v1(5650,3010)
MM_M3CTRL2: J31.1 U10.5 | length 1388.7
  Top Layer w10: J31.1 v1(4630,2450) ; v1(5430,2980) 5617.4,2980 U10.5
  Bottom Layer w10: v1(4630,2450) 4630,2490 4810,2490 4850,2530 4850,2680 5150,2980 v1(5430,2980)
MM_M4AOUT: J3.2 J57.2 | length 1664.6
  Top Layer w10: v1(5260,3010) 5260,2890 5290,2860 v1(5590,2860) ; v1(5260,3480) J57.2 ; J3.2 5780,2440 5790,2450 v1(5790,2610)
  Bottom Layer w10: v1(5260,3010) v1(5260,3480) ; v1(5590,2860) 5570,2860 5570,2710 5600,2680 5622.9,2680 5642.9,2700 5660,2700 5750,2610 v1(5790,2610)
MM_M4BOUT: J7.2 J59.2 | length 1124.6
  Top Layer w10: v1(5550,2700) 5580,2670 5580,2590 5680,2490 J7.2 ; v1(5550,3360) 5580,3360 5610,3390 J59.2
  Bottom Layer w10: v1(5550,2700) 5550,2910 5540,2920 5540,2960 5550,2970 v1(5550,3360)
MM_M4CTRL1: J10.1 J60.1 | length 1262.4
  Top Layer w10: v1(5520,3480) J60.1 ; J10.1 5530,2650 v1(5540,2660)
  Bottom Layer w10: v1(5520,3480) 5520,2693.9 5520,2680 v1(5540,2660)
MM_M4CTRL2: J12.1 J62.1 | length 989.9
  Top Layer w10: J12.1 5430,2420 5490,2480 v1(5490,2620) ; v1(5465,2890) 5550,2890 v1(5610,2950) ; J62.1 5790,2980 5800,2970 v1(5800,2950)
  Bottom Layer w10: v1(5465,2890) 5440,2865 5440,2830 5460,2810 5460,2650 v1(5490,2620) ; v1(5610,2950) v1(5800,2950)
MM_RESV15: J17.2
MM_USART2RX: J11.2
NTC1_2: C17.1 J53.1 J53.2 NTC1.2 U6.5 | length 966.1
  Top Layer w27.56: J53.1 J53.2
  Top Layer w39.37: v3(4189.92,3010) J53.1 ; C17.1 4380.63,2979.37 J53.2 4430,3010 4474.5,3054.5 U6.5
  Bottom Layer w39.37: NTC1.2 v3(4189.92,3010)
Q2_1: Q2.1 R8.1 | length 116.8
  Top Layer w19.68: Q2.1 6292.6,2622.6 6330,2660 R8.1
Q3_3: J40.1 Q3.3 Q4.3 R10.1 R11.1 | length 919.4
  Top Layer w19.68: Q3.3 4990.79,1960 R10.1 ; R10.1 5130,1910 5210,1910 5260.8,1960.8 Q4.3 ; R11.1 5259.8,1960.8 Q4.3 ; J40.1 5360.01,1859.98 Q4.3
Q5_1: Q5.1 R24.1 | length 142.3
  Top Layer w10: Q5.1 4301.97,3790 R24.1
Q5_2: J56.1 Q5.2 R44.2 R52.2 R58.2 | length 414.5
  Top Layer w10: R52.2 4189.66,3640 R44.2 J56.1 ; Q5.2 4299.37,3853.62 4255.75,3810 J56.1 ; R58.2 4315.75,3630 J56.1
Q5_3: Q5.3 R36.1 R45.1 R53.1 R59.1 | length 997.3
  Top Layer w10: R36.1 3591.96,3901.95 3610,3920 3730,3920 3741.96,3908.04 ; R45.1 3741.96,3908.04 ; R53.1 3892,3882 ; R59.1 4041.96,3878.04 4020,3900 ; Q5.3 4220.63,3849.37 4150,3920 4040,3920 4020,3900 ; 3741.96,3908.04 3865.96,3908.04 3892,3882 ; 3892,3882 3910,3900 4020,3900
R4_2: R4.2 R9.1 | length 71.3
  Top Layer w19.68: R4.2 R9.1
R5_1: J38.1 R5.1 R6.1 R7.1 R12.1 R13.1 R14.1 R16.1 R17.1 R18.1 R19.1 R20.1 R21.1 | length 1441.6
  Top Layer w19.68: v1(6360,2020) 6360,2079.37 R21.1 R5.1 ; v1(6590,2180) 6590,2239.37 R12.1 R19.1 6640,2560 6650,2570 J38.1
  Bottom Layer w19.68: v1(6360,2020) 6429.99,2020 v1(6590,2180)
R5_2: J41.2 R5.2 R6.2 R7.2 R12.2 R13.2 R14.2 R16.2 R17.2 R18.2 R19.2 R20.2 R21.2 | length 1105.8
  Top Layer w19.68: J41.2 6380,1990 6439.37,2049.37 R21.2 R5.2 ; R6.2 R18.2 ; R12.2 R19.2
R15_1: J43.1 R9.2 R15.1 | length 339.3
  Top Layer w19.68: R9.2 R15.1 6460.63,2829.37 6470,2820 6640,2820 6650,2810 J43.1
R22_1: J54.1 R22.1 | length 213
  Top Layer w10: J54.1 4370,2830 4380,2840 4490,2840 4510,2820 R22.1
R25_2: R25.2 R26.1 R27.2 R28.1 R29.1 R30.2 R31.1 R32.2 R33.1 R34.2 R35.1 R37.2 R38.1 R39.2 R46.2 R47.1 | length 1417.1
  Top Layer w10: R34.2 4770,3237.04 R35.1 4837.04,3237.04 4850,3250 ; R46.2 R27.2 ; R31.1 R47.1 R27.2 ; R30.2 4800,3487.04 4800,3632.96 ; R32.2 R33.1 4802.96,3632.96 4820,3650 4820,3700 4787.04,3732.96 R29.1 ; 4794.7,3487 4813,3487 4840,3460 4840,3390 4823,3373 R47.1 ; R37.2 R39.2 R38.1 4772.96,3032.96 4780,3040 4780,3050 4797.04,3067.04 R28.1 4805.92,3067.04 R26.1 4772.96,3112.96 4780,3120 4780,3130 4790,3140 4790,3160 4792.96,3157.04 R25.2 4837.04,3157.04 4850,3170 4850,3250 ; R27.2 4832.96,3317.04 4850,3300 4850,3250
R40_2: R40.2 R41.1 | length 50.7
  Top Layer w10: R40.2 R41.1@3780.35,3690
R41_2: R41.2 R42.1 | length 60.7
  Top Layer w10: R41.2 R42.1@3900.35,3690
R42_2: R42.2 R43.1 | length 55.9
  Top Layer w10: R42.2 3985.24,3690 ; 3980,3690 R43.1@4010.35,3690
R43_2: R43.2 R44.1 | length 60.7
  Top Layer w10: R43.2 R44.1@4130.35,3690
R49_1: R48.2 R49.1 | length 60.7
  Top Layer w10: R48.2 R49.1@3790.35,3630
R50_1: R49.2 R50.1 | length 50.7
  Top Layer w10: R49.2 R50.1@3900.35,3630
R51_1: R50.2 R51.1 | length 60.7
  Top Layer w10: R50.2 R51.1@4020.35,3630
R52_1: R51.2 R52.1 | length 60.7
  Top Layer w10: R51.2 R52.1@4140.35,3630
R55_1: R54.2 R55.1 | length 230.4
  Top Layer w10: R55.1@4400.35,3540 4400.35,3529.65 4430,3500 4560,3500 4579.66,3519.66 R54.2
R56_1: R55.2 R56.1 | length 84.4
  Top Layer w10: R56.1 R55.2
R57_1: R56.2 R57.1 | length 60.7
  Top Layer w10: R56.2 R57.1@4520.35,3600
R58_1: R57.2 R58.1 | length 425.3
  Top Layer w10: R58.1 4260.3,3609.6 4290,3580 4350,3580 4360,3590 4360,3630 4380,3650 4530,3650 R57.2
R61_2: R61.2 U9.7 | length 129.4
  Top Layer w10: U9.7 5670.16,3279.84 5710.63,3239.37 R61.2
S$14: 
S$26217: 
SW_1: J49.1 J49.2 NTC1.1 U4.1 | length 1214.6
  Top Layer w23.62: J49.2 J49.1
  Top Layer w39.37: U4.1 3581,2349 3820,2110 J49.2 ; NTC1.1 4270,2320 4270,2140 4240.01,2110.01 J49.1
U1_1: Q1.1 U1.1 | length 106.6
  Top Layer w13.78: Q1.1 4480.43,1831.54 U1.1
U1_2: C2.1 J5.1 Q1.3 U1.2 | length 662.9
  Top Layer w13.78: C2.1 4360.6,1760 4440,1760 4490,1710 4506,1710 ; C2.1 4350.63,1850 Q1.3 ; U1.2 4506,1710 ; J5.1 4630,1730 4610,1710 4506,1710
U1_11: U1.11
U1_12: J25.2 R1.1 U1.12 | length 333
  Top Layer w13.78: U1.12 4582.8,1977.2 4610,1950 v1(4670,1950) R1.1 ; v1(4670,1850) 4690,1830 J25.2
  Bottom Layer w13.78: v1(4670,1850) v1(4670,1950)
U1_13: J22.2 R2.1 U1.13 | length 476.4
  Top Layer w13.78: J22.2 4650,1880 4557.21,1972.79 U1.13 4557.2,2057.2 4580,2080 4690,2080 4710.6,2059.4 R2.1
U1_16: C1.1 J6.2 Q1.2 U1.16 | length 981.3
  Top Layer w13.78: C1.1 4310,2029.37 v1(4310,1960) 4312.6,1957.4 Q1.2 ; Q1.2 4447.4,1957.4 4480.4,1990.4 U1.16 ; J6.2 v1(4810,1680)
  Bottom Layer w19.68: v1(4310,1960) 4310,1920 4530,1700 4610,1700 4640,1670 4810,1670 v1(4810,1680)
U3_1: D1.1 L1.1 U3.1 | length 1303.9
  Top Layer w19.68: D1.1 6030,2668.9 6030,2620 5985,2575 U3.1 ; D1.1 5919.29,2859.29 6060,3000 6060,3320 6216.13,3476.13 L1.1
U3_2: R8.2 U3.2 | length 620.7
  Top Layer w19.68: U3.2 6035,2525 6100,2590 v1(6100,2630) ; R8.2 v1(6440,2720)
  Bottom Layer w19.68: v1(6100,2630) 6160,2630 6250,2720 v1(6440,2720)
U3_3: C3.2 U3.3 | length 200.7
  Top Layer w19.68: C3.2 5920,2400.6 5920,2460 5935,2475 U3.3
U3_5: J43.2 U3.5 | length 599.1
  Top Layer w19.68: U3.5 6275,2425 v1(6280,2430) ; v1(6530,2780) J43.2
  Bottom Layer w19.68: v1(6280,2430) 6530,2680 v1(6530,2780)
U3_6: J42.2 U3.6 | length 416
  Top Layer w19.68: J42.2 5990,2630 v1(6000,2640) ; U3.6 6235,2475 v1(6250,2490)
  Bottom Layer w19.68: v1(6000,2640) 6040,2640 6190,2490 v1(6250,2490)
U3_7: J38.2 L2.2 R3.1 U3.7 | length 1163
  Top Layer w19.68: U3.7 v1(6305,2525) ; L2.2 6290.01,3169.99 v1(6490,2970) ; v1(6490,2730) 6540.01,2730 J38.2 6589.37,2729.37 R3.1
  Bottom Layer w19.68: v1(6305,2525) 6315,2525 6490,2700 v1(6490,2730) v1(6490,2970)
U3_8: R3.2 U3.8 | length 366.5
  Top Layer w19.68: U3.8 6295,2575 6330,2610 6490,2610 6510.6,2630.6 R3.2
U4_3: U4.3
U5_2: C16.1 J48.2 U5.2 U5.4 | length 566.7
  Top Layer w19.68: U5.2 5980,3630 C16.1 ; J48.2 6089.37,3439.37 C16.1
  Top Layer w39.37: U5.2 U5.4
U5_3: J51.1 U5.3 | length 378.2
  Top Layer w19.68: J51.1 v1(5850,3430) ; v1(6030,3643.07) U5.3@6070.55,3643.07
  Bottom Layer w19.68: v1(5850,3430) 6030,3610 v1(6030,3643.07)
U6_2: J55.2 U6.2 | length 1184.3
  Top Layer w10: U6.2 4215,3185 4160,3240 4160,3280 4210,3330 4430,3330 4660,3560 v1(4660,3640) ; v1(4660,3880) J55.2
  Bottom Layer w10: v1(4660,3640) v1(4660,3880)
U6_4: J52.1 U6.4 | length 184.1
  Top Layer w10: J52.1 4090,3080 4110,3060 4190,3060 4215,3085 U6.4
U6_8: C18.1 R22.2 R23.1 U6.8 | length 606.1
  Top Layer w10: U6.8 4505,3235 4540.63,3199.37 C18.1 4540.63,2889.37 4610,2820 R22.2 4610.63,2820 R23.1
U8_2: J57.1 U8.2 | length 152.6
  Top Layer w10: J57.1 U8.2
U8_3: J59.1 U8.3 | length 203.3
  Top Layer w10: U8.3@5472.6,3530.1 5450,3530 5450,3470 5500,3420 J59.1
U8_5: J62.2 U8.5 | length 648.4
  Top Layer w10: U8.5 5620,3510.5 v1(5620,3505) ; v1(5830,3140) 5850,3120 J62.2
  Bottom Layer w10: v1(5620,3505) 5620,3350 v1(5830,3140)
U8_6: J60.2 U8.6 | length 235.2
  Top Layer w10: U8.6 5720,3530.15 5750,3500.15 J60.2
U8_7: R60.2 U8.7 | length 316.3
  Top Layer w10: U8.7 5649.84,3549.84 5779.37,3679.37 R60.2
U9_2: J58.1 U9.2 | length 210
  Top Layer w10: J58.1@5410,3420 5410,3370 5468.6,3311.4 5500.2,3279.8 U9.2@5532.6,3279.8
U9_3: J61.1 U9.3 | length 167.3
  Top Layer w10: J61.1 5410,3320 5470.2,3260.1 U9.3@5542.6,3260.1
U10_2: J63.1 U10.2 | length 245.8
  Top Layer w10: J63.1 5350,3100 5430,3100 5490.16,3039.84 U10.2
U10_3: J65.1 U10.3 | length 259.8
  Top Layer w10: J65.1 5350,2950 5430,3030 5470,3030 5479.9,3020.1 U10.3@5542.6,3020.1
U10_7: R62.2 U10.7 | length 181.8
  Top Layer w10: U10.7@5617.4,3039.6 5680,3039.6 5680,2939.8 R62.2@5660.6,2939.8
U11_2: J64.1 U11.2 | length 260.8
  Top Layer w10: J64.1 5350,2780 5369.84,2799.84 U11.2
U11_3: J66.1 U11.3 | length 295.8
  Top Layer w10: J66.1 5340,2660 5350,2670 5430,2670 5450,2690 5450,2730 5500.1,2780.1 U11.3@5542.6,2780.1
U11_5: J68.2 U11.5 | length 146.9
  Top Layer w10: U11.5 5749.53,2760.47 J68.2
U11_6: J67.2 U11.6 | length 212.4
  Top Layer w10: U11.6 5790,2780.15 J67.2
U11_7: R63.2 U11.7 | length 254.9
  Top Layer w10: v1(5610,2710) 5620.63,2699.37 R63.2 ; U11.7 5644.8,2799.8 v1(5655,2810)
  Bottom Layer w10: v1(5610,2710) 5610,2765 v1(5655,2810)
USART2TX: J14.1
USB_9V: D2.2 J6.1 J27.1 J54.2 | length 2390
  Top Layer w10: D2.2 4000,3110 4210,2900 4210,2860 4310,2760 4390.2,2760 J54.2 4430,2790 v1(4480,2740) ; v1(4480,2610) 4810,2610 4860,2560 v1(4860,2440) ; v2(4750,1933) v2(4750,1960)
  Top Layer w19.68: v1(4660,1700) 4680,1680 J6.1 ; v2(4750,1933) v2(4750,1960) v1(4750,2070) ; J27.1 4830,2410 v1(4860,2440)
  Bottom Layer w10: v1(4480,2610) v1(4480,2740)
  Bottom Layer w19.68: v1(4660,1700) 4660,1760 4750,1850 v2(4750,1960) v2(4750,1933) ; v1(4750,2070) 4810,2130 4810,2380 4860,2430 v1(4860,2440)
USB_CC1: J22.1 U2.A5 | length 372.7
  Top Layer w19.68: J22.1 4900,1880 4910,1890 4930,1910 5070,1910 5090.3,1889.7 U2.A5@5090.3,1858.1
USB_CC2: J25.1 U2.B5 | length 469.4
  Top Layer w19.68: J25.1 v1(4870,1830) ; v1(5100,1760) 5129.69,1789.69 U2.B5
  Bottom Layer w19.68: v1(4870,1830) 4940,1760 v1(5100,1760)
USB_GND: J19.2 U2.A12 U2.B12 | length 601.1
  Top Layer w19.68: J19.2 4880,1780 4890,1790 v1(4980,1790) 5001.74,1811.74 U2.B12 ; U2.A12@5218.3,1858.1 5220,1858.1 v1(5220,1790)
  Bottom Layer w19.68: v1(4980,1790) v1(5220,1790)
USB_VIN: J5.2 U2.A9 U2.B9 | length 724.8
  Top Layer w19.68: J5.2 4830,1730 4910,1650 4990,1650 5050.2,1710.2 ; U2.B9@5050.2,1858.1 5050.2,1710.2 ; U2.A9@5169.9,1858.1 5169.9,1759.7 5119.9,1710 5050.2,1710.2
VBT: C4.2 C19.1 C20.1 C23.1 C24.1 J16.1 J41.1 J42.1 U8.1 U9.1 U10.1 U11.1 | length 4362.5
  Top Layer w10: C23.1 5370.6,3800.6 5420,3850 5500,3850 5530.6,3819.4 C24.1 ; C23.1 C19.1 5370.63,3629.37 v1(5410,3590) 5430.5,3569.5 U8.1 ; v1(5485,3335) 5494.99,3335 5530.48,3299.52 U9.1 ; v1(5490,2830) 5500.47,2819.53 U11.1 ; C24.1 5609.37,3711.26 C20.1 ; U10.1 5510.47,3059.53 5490,3080 v1(5490,3100) v1(5640,3100)
  Top Layer w19.68: v1(5900,2590) J42.1 ; v1(6210,2350) 6210,2250 ; J41.1 6260,2200 6210,2250 ; 6210,2250 C4.2 6210,2250
  Top Layer w23.62: J16.1 v1(5230,2450)
  Bottom Layer w10: v1(5410,3590) 5410,3410 v1(5485,3335) 5485,3105 v1(5490,3100) v1(5490,2830) ; v1(5640,3100) 5859.99,3100 5900,3059.99 v1(5900,2590)
  Bottom Layer w19.68: v1(5900,2590) 6050,2590 6210,2430 v1(6210,2350)
  Bottom Layer w23.62: v1(5230,2450) 5310,2530 5839.2,2530 v1(5900,2590)
pads on no net: U1.3 U1.4 U1.6 U1.7 U1.8 U1.9 U1.10 U1.14 U1.15 U2.1 U2.2 U2.3 U2.4 U8.9 U9.9 U10.9 U11.9

## Polygon pours and split planes (outlines as drawn)
GND on Bottom Layer (solid): 3440,3979.99 6760,3979.99 6760,1510 6770,1500 3430,1500
GND on Top Layer (solid): 3430,4020 6750,4020 6750,1550 6760,1540 3420,1540

## Keep-outs
Keep-Out Layer:
  lines w10 net S$14: 3495.83,2200 ccw(c5109.98,4062.6) 6724.13,2200 ; 4770,3959.88 cw(c4770,3823.71) 4866.29,3920 ccw(c4987,4040.71) 4987,3870 ; 5229.29,3870 ccw(c5229.29,4040.71) 5350,3920 cw(c5446.29,3823.71) 5446.29,3959.88

## Silkscreen, mask and mechanical layers (free items; w line width, h text height)
Bottom Overlay:
  text "Micro-Mouse Power Module / Rev 1.0 / designed by Group 62: / N. Markovic (MRKNIK004) / T. Goodzera (GDZTAK003) / at UCT for: / EEE3088F 2025" at 6620,3840 h80
Document:
  lines w3.94 net S$26217: 3520,2200 3630,2110 3780,2000 3900,1930 4020,1870 4020,2600 3520,2600 3520,2200